# Altium PCB HVPSV3_GaN_system_5_5V_v2.PcbDoc (part 2 of 3)
Units mil, origin at the board's own origin, x right, y up, seen from the top; angles counter-clockwise.
Board outline 3914 x 4092 mil, 4 copper layers (Top Layer, Internal Plane 1, Internal Plane 2, Bottom Layer); 212 components, 159 nets, 925 pads, 655 vias.
Unrouted connection lines stored in the file: 4.
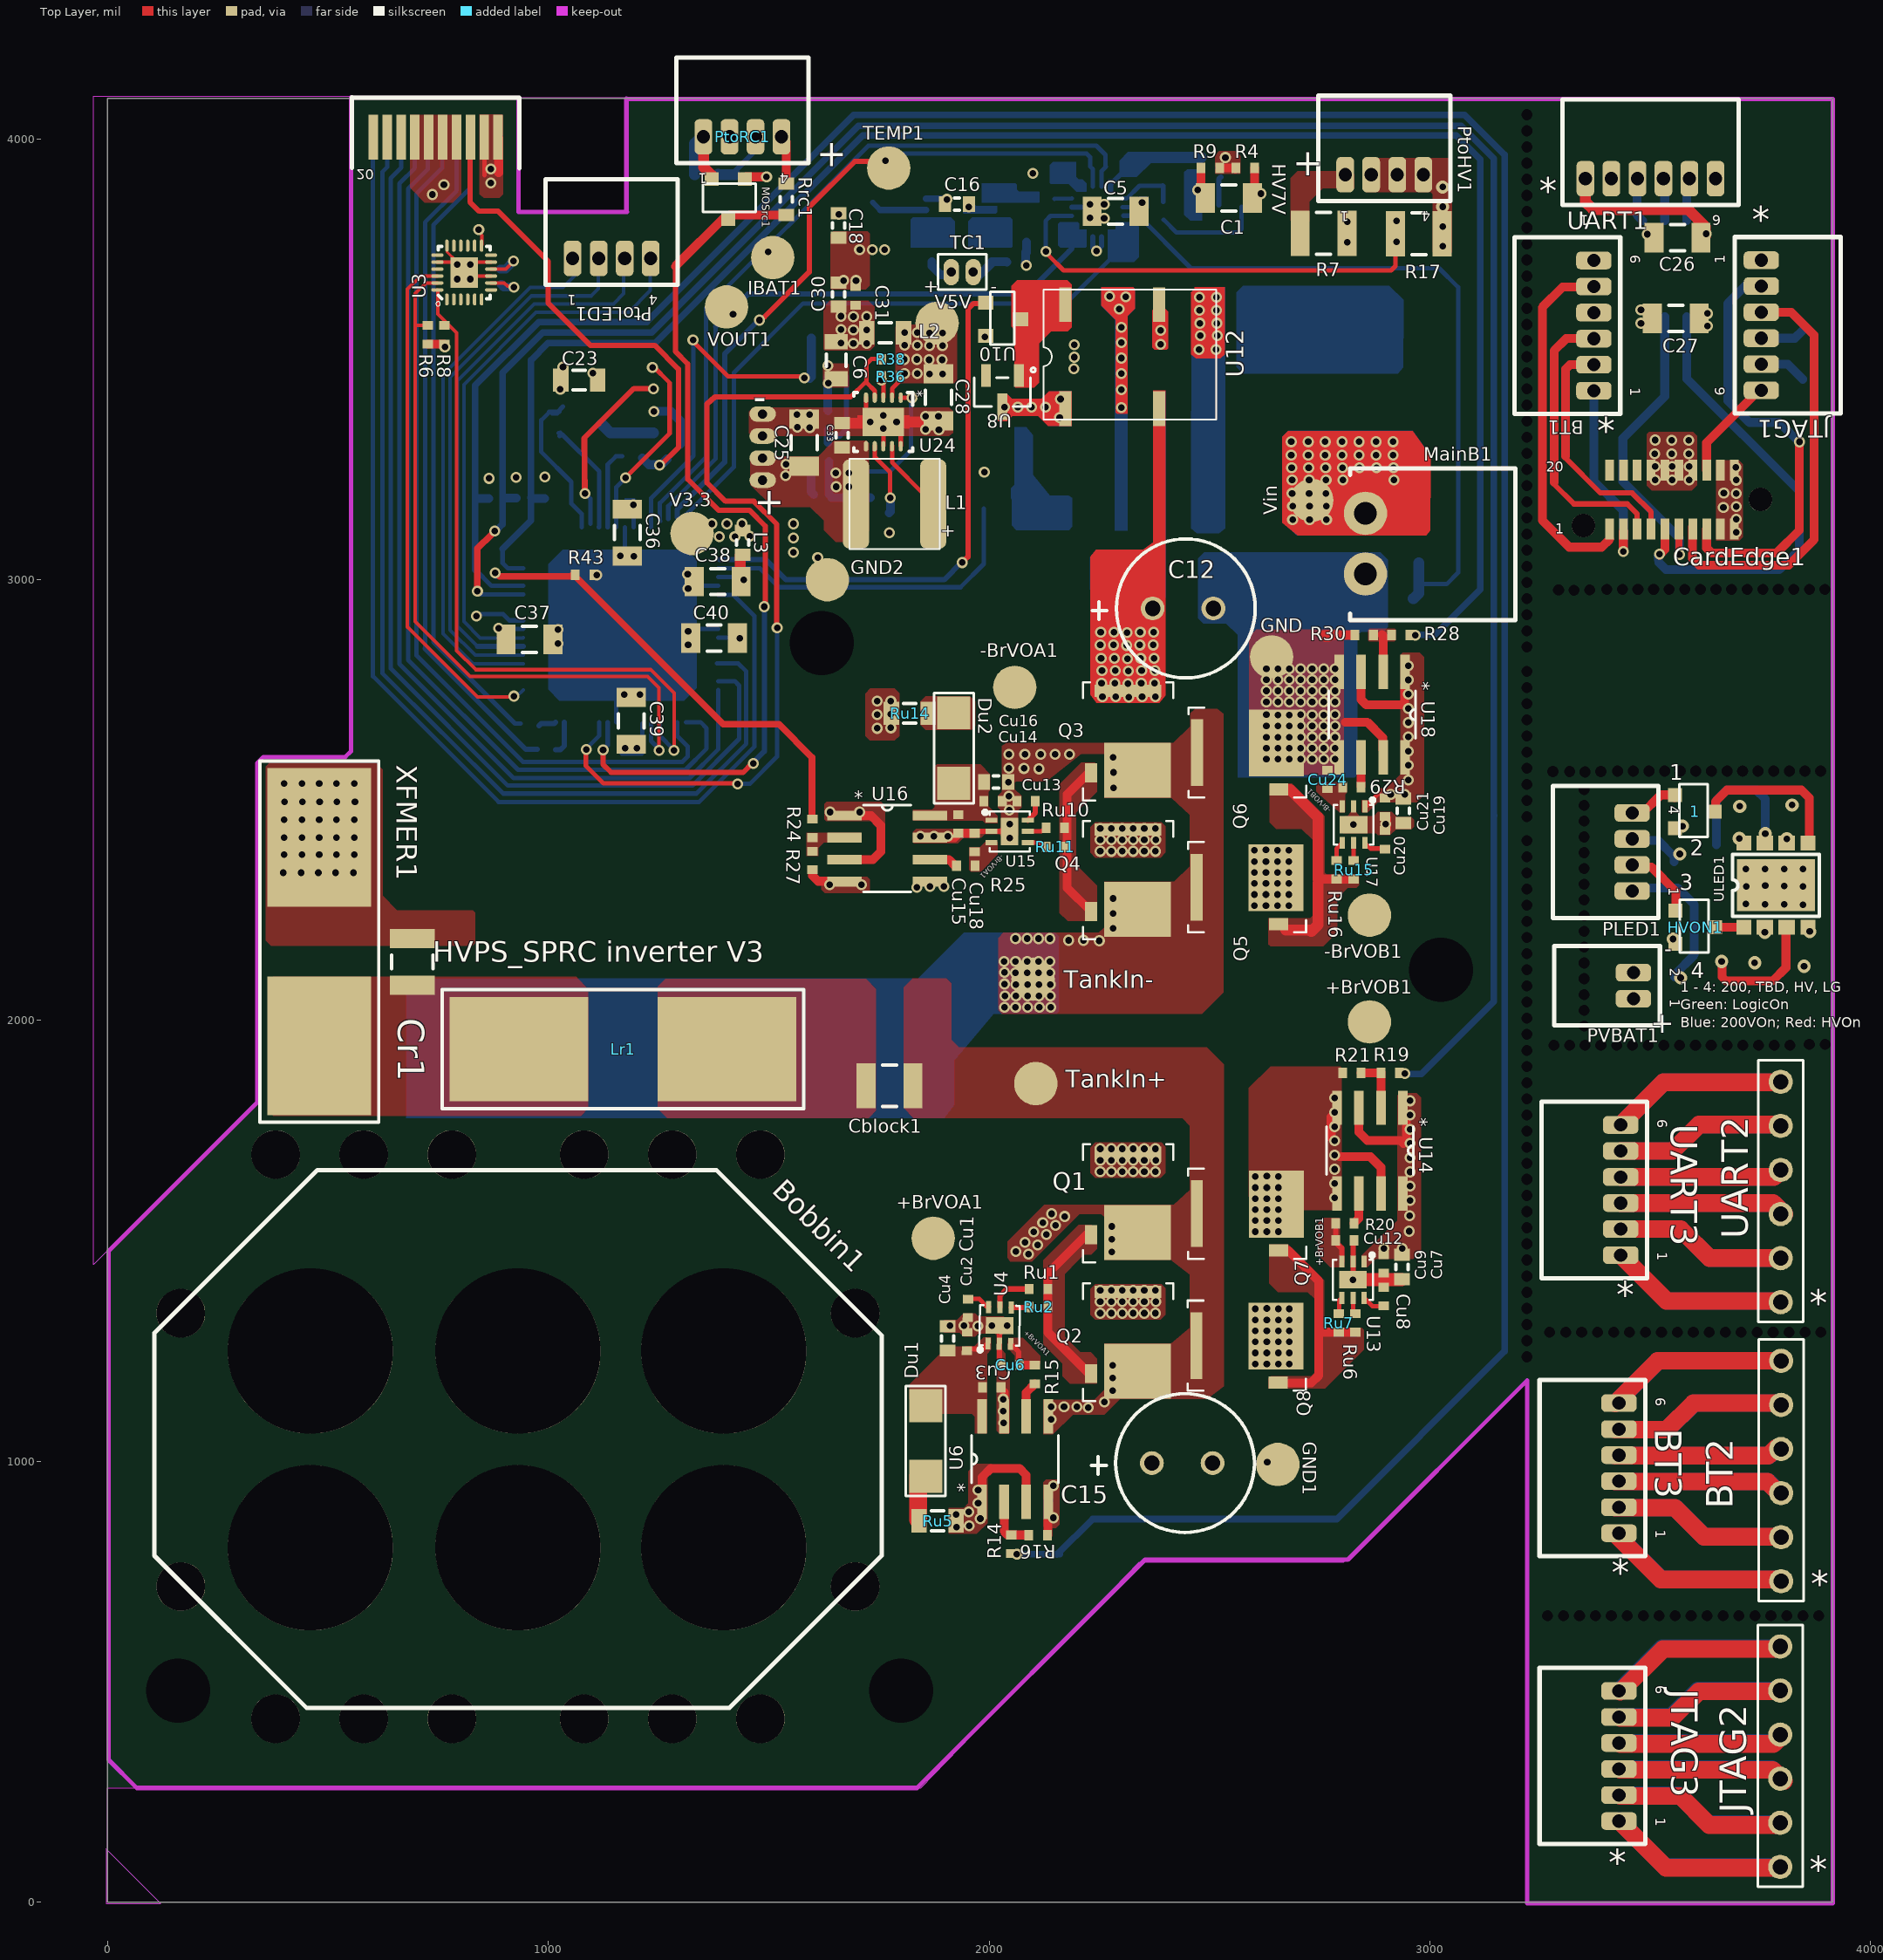
[diagram p0: Top Layer view]

## Via types
v1: diameter 25, hole 15, Top Layer to Bottom Layer, 625 vias
v2: diameter 30, hole 15, Top Layer to Bottom Layer, 30 vias

## Nets (pads, with @x,y where several pads share a name; then routed paths per layer and width w, separated by ;. In a path a pad name is that pad's centre, name@x,y a point inside that pad or via, vN(x,y) a via of type N, cw(c..) or ccw(c..) an arc to the next point about the centre after c; other vN are vias at no path point) (continued)
GND_LED: (continued)
  other v2: 3552,2185 3847,2263 3760.33,2264 3803.67,2264 3717,2265 3847,2304 3718,2304.5 3804,2305 3761,2306 3717,2344 3760.33,2344 3803.67,2344 3847,2344 3573,2441
HV7V: PtoHV1.1 R7.2
HVON: PtoLED1.3 U26.54 | length 1272
  Bottom Layer w8: 839.21,2848.79 794,2894 794,3452 968,3626 1148,3626 1171,3649 1171,3714 PtoLED1.3@1187,3730
  Bottom Layer w12: 839.21,2848.79 U26.54@943,2848.79
HVON_LED: HVON1.3 PLED1.2 | length 150.8
  Top Layer w20: PLED1.2@3477,2348 3503,2348 3558,2293 HVON1.3@3558,2246
LBO: R34.1 R35.2 U5.1 | length 196.6
  Bottom Layer w12: 1635,3326 1661,3326 1676,3341 U5.1@1676,3460
  Bottom Layer w20: R34.1@1635,3311 1635,3326 1635,3340 R35.2@1636,3341
LOGICON: PtoLED1.4 U26.55 | length 1276.5
  Bottom Layer w8: U26.55@943,2868.47 942.03,2867.5 845.5,2867.5 808,2905 808,3443 972,3607 1182,3607 1231,3656 1231,3714 PtoLED1.4@1244,3727
LOGICON_LED: LogicON1.3 PLED1.1 | length 323.4
  Bottom Layer w20: PLED1.1@3475,2301 3562,2301 3600,2263 3600,2149 3555,2104 LogicON1.3@3555,2099
  other v2: 3569,2097
LOGICVB: U5.3 U5.4 U26.12 | length 838.3
  Top Layer w10: v1@1326,3543 1408,3461 v1@1573,3461
  Bottom Layer w10: U26.12@1232.9,3119 1232.9,3184.9 1329,3281 v1@1329,3544
  Bottom Layer w20: U5.3@1593,3457 1596.6,3460.6 U5.4@1596.6,3548
  other v1: 1581,3458 1328,3544
MCLR*: GoldFinger1.13 R41.1 R46.2 | length 1130.5
  Top Layer w12: GoldFinger1.13@822.01,3999 822.01,3856.99 843,3836 886,3836 999,3723 999,3628 1095,3532 1241,3532 1295,3478 1295,3300 v1@1254.5,3259.5
  Bottom Layer w20: R46.2@1213,3276 1228,3261 1256,3261 R41.1@1269,3274
  other v1: 1252,3260
MCLR*_CE: CardEdge1.13 JTAG1.5 | length 233.1
  Top Layer w20: CardEdge1.13@3628.01,3249 3628.01,3311.01 JTAG1.5@3749,3432
MCU_RX1: GoldFinger1.6 U26.34 | length 1995.8
  Bottom Layer w10: GoldFinger1.6@759,3992 759,3934 701,3876 701,2828 942,2587 1304,2587 1316,2599 1316,2622 1292,2646 1292,2676.95 U26.34@1291.95,2677
MCU_RX_CE: CardEdge1.6 U23.7 | length 692.6
  Top Layer w12: v1@3564,3054 v1@3565.02,3055.02
  Top Layer w16: v1@3565.02,3055.02 CardEdge1.6@3565.02,3115.14
  Bottom Layer w20: U23.7@3533,3596.7 3533,3416 3438,3321 3438,3223 3566,3095 v1@3566,3058
  other v1: 3566,3057
MCU_TX1: GoldFinger1.5 U26.33 | length 2082.7
  Bottom Layer w10: GoldFinger1.5@729,3982 726,3979 726,3931 682,3887 682,2818 931,2569 1311,2569 1359,2617 1359,2663 1345,2677 U26.33@1311.64,2677
MCU_TX_CE: CardEdge1.5 U23.6 | length 1063.7
  Top Layer w20: v1@3521,3056 3533.52,3068.52 CardEdge1.5@3533.52,3115.14
  Bottom Layer w20: v1@3522,3059 v1(3521,3058) 3518,3055 3520,3039 3536,3023 3793,3023 3838,3068 3838,3201 3583,3456 U23.6@3583,3596.7
NCS: U3.22 U26.49 | length 1182.3
  Top Layer w8: U3.22@747.98,3689.13 710.13,3689.13 680,3659 680,2893 839,2734 v1@922,2734
  Bottom Layer w8: v1@921,2736 v1(922,2736) 928.64,2736 U26.49@943,2750.36
Net1_2: 1.2 ULED1.5 | length 358.2
  Top Layer w20: 1.2@3648,2472 3648,2497 3674,2523 3843,2523 3861,2505 ULED1.5@3861,2403
NetBT2_0: BT2.0 BT3.0 | length 816.1
  Top Layer w40: BT3.0@3420,835.89 3523.89,732 BT2.0@3785,732
  Bottom Layer w40: BT3.0@3421,835.89 3524.89,732 BT2.0@3786,732
NetBT2_1: BT2.1 BT3.1 | length 794.8
  Top Layer w25: BT2.1@3783,829 BT2.1@3788,824
  Top Layer w40: BT3.1@3420,894.94 3556.06,894.94 3622,829 BT2.1@3783,829
  Bottom Layer w25: BT2.1@3784,829 BT2.1@3789,824
  Bottom Layer w40: BT3.1@3421,894.94 3557.06,894.94 3623,829 BT2.1@3784,829
NetBT2_2: BT2.2 BT3.2 | length 762.7
  Top Layer w40: BT3.2@3420,954 3766,954 BT2.2@3791,929
  Bottom Layer w40: BT3.2@3421,954 3767,954 BT2.2@3792,929
NetBT2_3: BT2.3 BT3.3 | length 744
  Top Layer w40: BT3.3@3420,1013.06 3768.06,1013.06 BT2.3@3785,1030
  Bottom Layer w40: BT3.3@3421,1013.06 3769.06,1013.06 BT2.3@3786,1030
NetBT2_4: BT2.4 BT3.4 | length 773.6
  Top Layer w40: BT3.4@3420,1072.11 3538.11,1072.11 3598,1132 BT2.4@3782,1132
  Bottom Layer w40: BT3.4@3421,1072.11 3539.11,1072.11 3599,1132 BT2.4@3783,1132
NetBT2_5: BT2.5 BT3.5 | length 804.2
  Top Layer w40: BT3.5@3420,1131.17 3516.83,1228 BT2.5@3782,1228
  Bottom Layer w40: BT3.5@3421,1131.17 3517.83,1228 BT2.5@3783,1228

## Text inside footprints (layer, text, board x,y; h text height)
BT1: Top Overlay "1" at 3447,3436.64 h40 r270; Top Overlay "6" at 3447,3736.64 h40 r270; Bottom Overlay "1" at 3447,3436.64 h40 r270; Bottom Overlay "6" at 3447,3736.64 h40 r270
BT3: Top Overlay "1" at 3504,844.53 h40 r270; Top Overlay "6" at 3504,1144.53 h40 r270; Bottom Overlay "1" at 3504,844.53 h40 r270; Bottom Overlay "6" at 3504,1144.53 h40 r270
CardEdge1: Top Overlay "20" at 3264.27,3237.07 h40; Top Overlay "1" at 3284.27,3097.07 h40
GoldFinger1: Top Overlay "20" at 564.27,3939 h40 r180; Bottom Overlay "1" at 564.27,3939 h40 r180
JTAG1: Top Overlay "6" at 3677,3417.53 h40 r90; Top Overlay "1" at 3677,3717.53 h40 r90; Bottom Overlay "6" at 3677,3417.53 h40 r90; Bottom Overlay "1" at 3677,3717.53 h40 r90
JTAG3: Top Overlay "6" at 3504,491.47 h40 r270; Top Overlay "1" at 3504,191.47 h40 r270; Bottom Overlay "6" at 3504,491.47 h40 r270; Bottom Overlay "1" at 3504,191.47 h40 r270
PLED1: Top Overlay "1" at 3534,2302.53 h40 r270; Top Overlay "4" at 3534,2487.53 h40 r270; Bottom Overlay "1" at 3534,2302.53 h40 r270; Bottom Overlay "4" at 3534,2487.53 h40 r270
PtoHV1: Top Overlay "4" at 3001.42,3844 h40 r180; Top Overlay "1" at 2816.42,3844 h40 r180; Bottom Overlay "4" at 3001.42,3844 h40 r180; Bottom Overlay "1" at 2816.42,3844 h40 r180
PtoLED1: Top Overlay "1" at 1063.47,3654 h40 r180; Top Overlay "4" at 1248.47,3654 h40 r180; Bottom Overlay "1" at 1063.47,3654 h40 r180; Bottom Overlay "4" at 1248.47,3654 h40 r180
PtoRC1: Top Overlay "4" at 1545.42,3930 h40 r180; Top Overlay "1" at 1360.42,3930 h40 r180; Bottom Overlay "4" at 1545.42,3930 h40 r180; Bottom Overlay "1" at 1360.42,3930 h40 r180
PVBAT1: Top Overlay "2" at 3537,2119 h40 r270; Top Overlay "1" at 3537,2049 h40 r270; Bottom Overlay "2" at 3537,2119 h40 r270; Bottom Overlay "1" at 3537,2049 h40 r270
U2: Bottom Overlay "*" at 2311.2,3883.69 h31.5 r270
U5: Bottom Overlay "*" at 1689,3474 h19.68 r270; Mechanical 13 "*" at 1689,3474 h19.68 r270
U6: Top Overlay "*" at 1959,930 h30 r90
U14: Top Overlay "*" at 2964,1780 h30 r270
U16: Top Overlay "*" at 1694,2490 h30
U18: Top Overlay "*" at 2969,2769 h30 r270
U19: Bottom Overlay "*" at 1764,3748 h30 r270; Mechanical 13 "*" at 1764.33,3745 h30 r270
U20: Bottom Overlay "*" at 1847,3802 h39.37 r180
U24: Top Overlay "*" at 1826.93,3429.93 h23.62 r270
U26: Bottom Overlay "*" at 999,3138 h50 r90
UART1: Top Overlay "6" at 3660.47,3835 h40 r180; Top Overlay "1" at 3360.47,3835 h40 r180; Bottom Overlay "6" at 3660.47,3835 h40 r180; Bottom Overlay "1" at 3360.47,3835 h40 r180
UART3: Top Overlay "1" at 3508,1475.53 h40 r270; Top Overlay "6" at 3508,1775.53 h40 r270; Bottom Overlay "1" at 3508,1475.53 h40 r270; Bottom Overlay "6" at 3508,1775.53 h40 r270